# EAGLE board brd2 (EAGLE 6.4), part 1 of 2
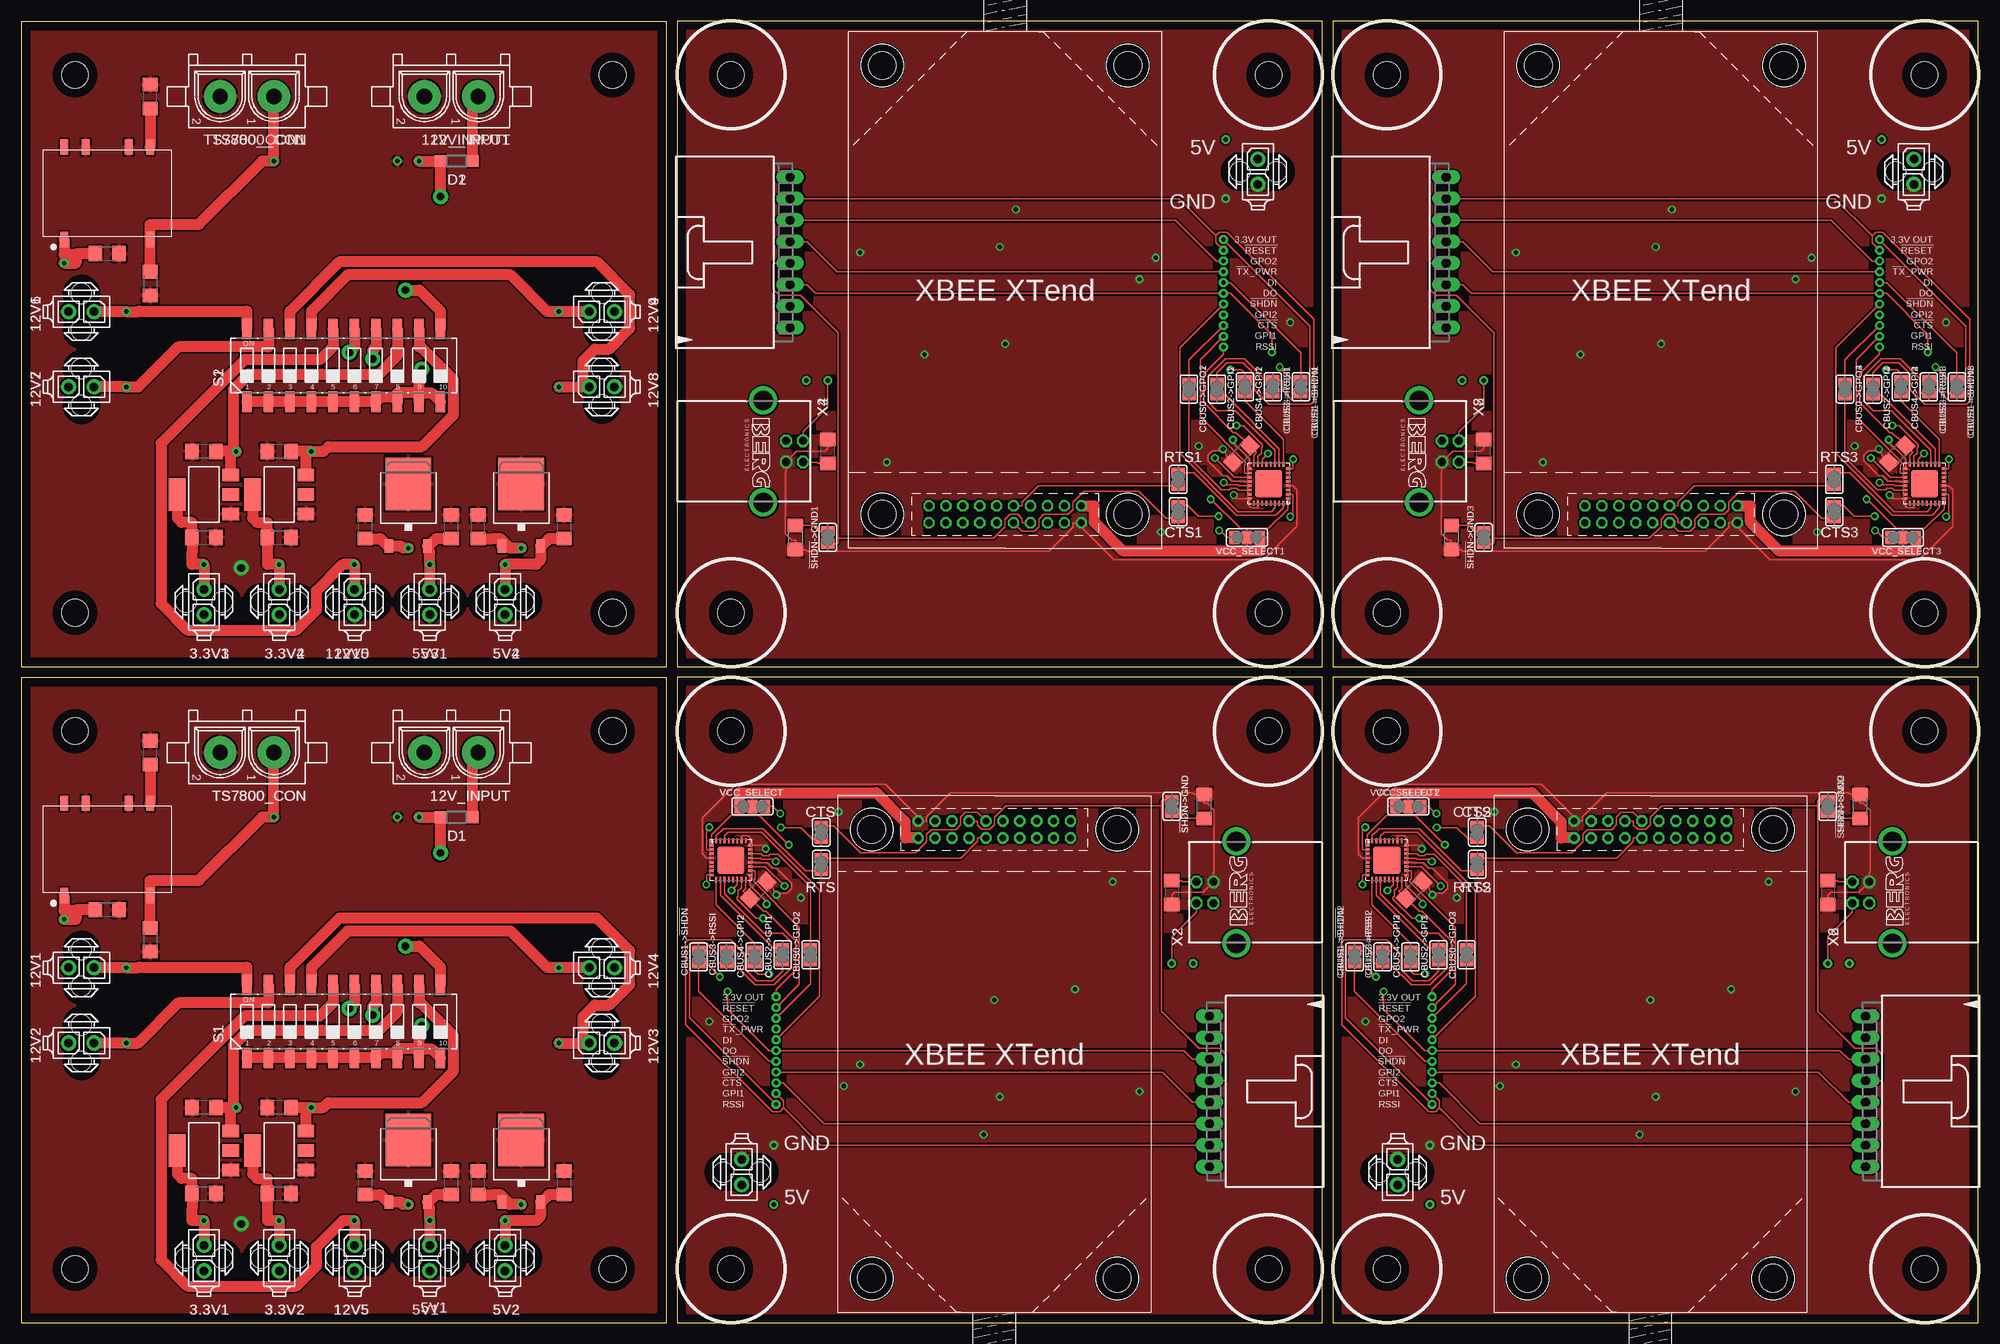
[diagram p0: board, top side]
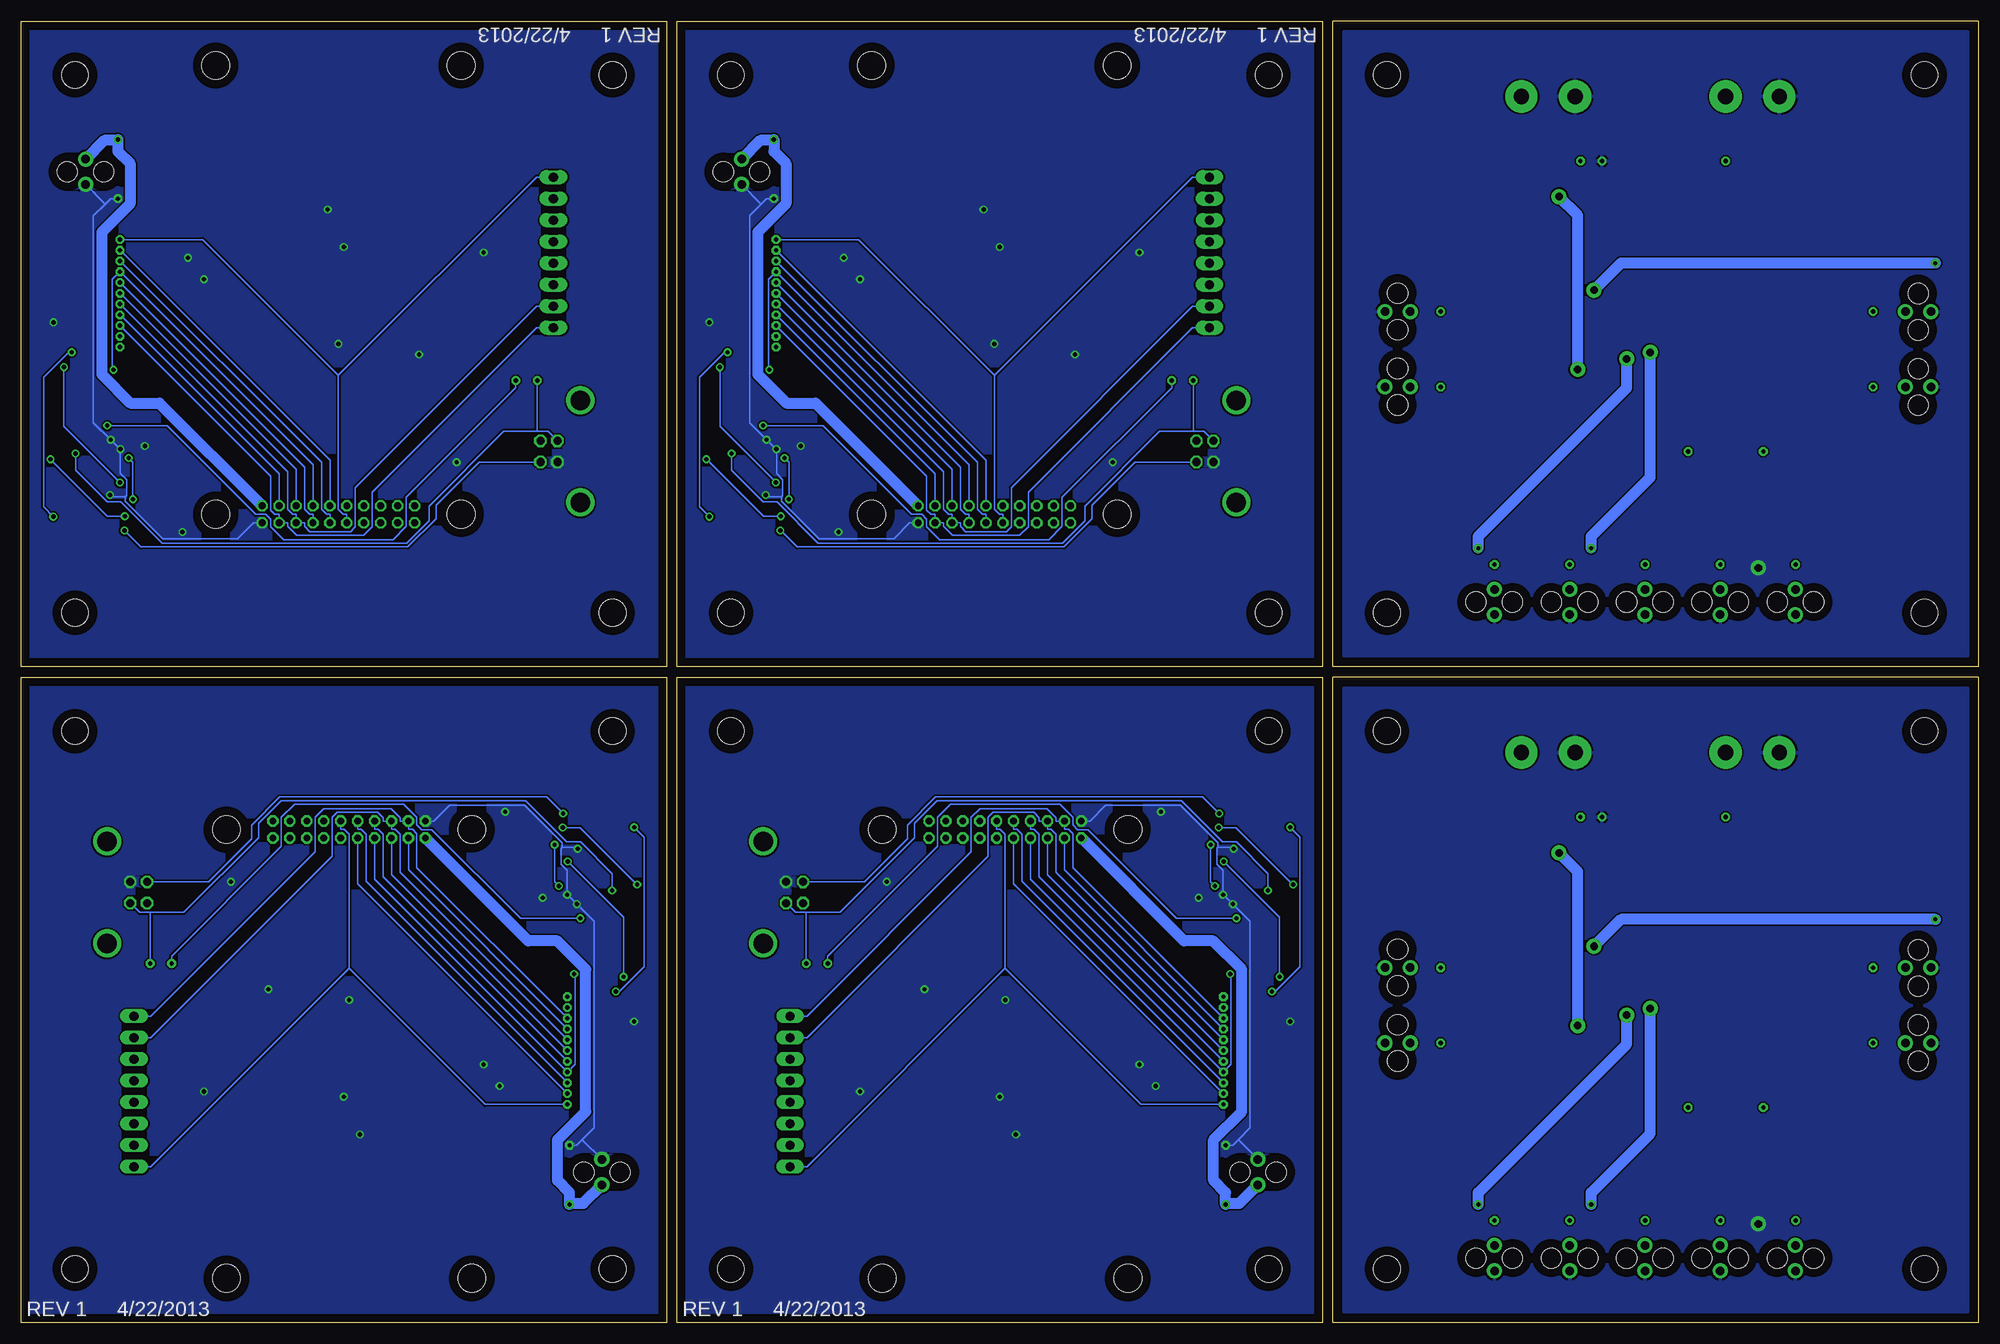
[diagram p1: board, bottom side, seen from below]

Size 231.14 x 153.67 mm. Coordinates in mm from the lower left corner, seen from the top.
Outline: 76.2,0 76.2,76.2 0,76.2 0,0 76.2,0
Outline: 77.47,0 153.67,0 153.67,76.2 77.47,76.2 77.47,0
Outline: 76.2,77.47 76.2,153.67 0,153.67 0,77.47 76.2,77.47
Outline: 153.67,153.67 77.47,153.67 77.47,77.47 153.67,77.47 153.67,153.67
Outline: 154.94,0 231.14,0 231.14,76.2 154.94,76.2 154.94,0
Outline: 231.14,153.67 154.94,153.67 154.94,77.47 231.14,77.47 231.14,153.67
Copper layers (1*16): Top 0.035mm / dielectric 1.5mm / Bottom 0.035mm
Design rules "default": minimum track width 10mil, minimum drill 0.6mm, track to track 8mil, track to pad 8mil, pad to pad 8mil, via to via 8mil, smd to smd 8mil, copper to edge 40mil, drill to drill 8mil, minimum pad ring 10mil, minimum via ring 8mil, stop-mask expansion 4mil, vias tented up to drill 0mil, thermal gap 10mil
Net classes: 1 Power: width 1.27 mm, drill 0.508 mm; 2 SMALL: width 0.178 mm
Holes 3.17 mm at 69.85,6.35 6.35,6.35 6.35,69.85 69.85,69.85 83.82,69.85 147.32,6.35 83.82,6.35 147.32,69.85 69.85,83.82 6.35,83.82 6.35,147.32 69.85,147.32 147.32,83.82 83.82,147.32 147.32,147.32 83.82,83.82 161.29,69.85 224.79,6.35 161.29,6.35 224.79,69.85 224.79,83.82 161.29,147.32 224.79,147.32 161.29,83.82
tRestrict: area 97.9,55.8 to 103,60.8; area 126.9,2.7 to 132,7.7; area 126.9,55.6 to 132,60.7; area 97.9,2.7 to 103,7.7; area 128.1,92.8 to 133.2,97.9; area 99.2,145.9 to 104.3,151; area 99.2,93 to 104.3,98; area 128.1,145.9 to 133.2,151; area 175.4,55.8 to 180.5,60.8; area 204.3,2.7 to 209.4,7.7; area 204.3,55.6 to 209.4,60.7; area 175.4,2.7 to 180.5,7.7; 4 more areas
bRestrict: area 126.9,55.6 to 132,60.7; area 97.9,2.7 to 103,7.7; area 97.9,55.8 to 103,60.8; area 126.9,2.7 to 132,7.7; area 99.2,93 to 104.3,98; area 128.1,145.9 to 133.2,151; area 128.1,92.8 to 133.2,97.9; area 99.2,145.9 to 104.3,151; area 204.3,55.6 to 209.4,60.7; area 175.4,2.7 to 180.5,7.7; area 175.4,55.8 to 180.5,60.8; area 204.3,2.7 to 209.4,7.7; 4 more areas
vRestrict: area 21.9,51.4 to 22,51.7; area 22,51.3 to 22,51.9; area 22,49.1 to 22,49.2; area 22,51.1 to 22,52; area 22,49.1 to 22,49.9; area 22,51.1 to 22.1,52.1; area 22,49.1 to 22.1,49.9; area 22.1,51 to 22.1,52.2; area 22.1,49.1 to 22.1,49.9; area 22.1,51 to 22.2,52.2; area 22.1,49.1 to 22.2,49.9; area 22.2,51 to 22.2,52.3; 5262 more areas

## Footprints (pad centres in the part's own frame; a part is rotated, then mirrored left to right if it is on the bottom)
794681-2 = drill 1 pad 1.778: 1 0,-1.5; 2 0,1.5 | hole 2.4: 2.13,0; -2.17,0
20MIL = drill 0.508 octagon: P$1 0,0
350759-4 = drill 1.8 pad 3.81: 1 -3.175,0; 2 3.175,0
C1206 = smd 1.6 x 1.8: 1 -1.4,0; 2 1.4,0
SJ = smd 1.168 x 1.6: 1 -0.762,0; 2 0.762,0
SOD123 = smd 1.4 x 1.4: A 1.9,0; C -1.9,0
QFN32 = smd 0.6 x 0.3: 1 -2.3,1.75; 2 -2.3,1.25; 3 -2.3,0.75; 4 -2.3,0.25; 5 -2.3,-0.25; 6 -2.3,-0.75; 7 -2.3,-1.25; 8 -2.3,-1.75; 17 2.3,-1.75; 18 2.3,-1.25; 19 2.3,-0.75; 20 2.3,-0.25; 21 2.3,0.25; 22 2.3,0.75; 23 2.3,1.25; 24 2.3,1.75 | smd 0.3 x 0.6: 9 -1.75,-2.3; 10 -1.25,-2.3; 11 -0.75,-2.3; 12 -0.25,-2.3; 13 0.25,-2.3; 14 0.75,-2.3; 15 1.25,-2.3; 16 1.75,-2.3; 25 1.75,2.3; 26 1.25,2.3; 27 0.75,2.3; 28 0.25,2.3; 29 -0.25,2.3; 30 -0.75,2.3; 31 -1.25,2.3; 32 -1.75,2.3 | smd 3.2 x 3.2: EXP 0,0
SOT223 = smd 1.5 x 2: 1 -2.3,-3.15; 2 0,-3.15; 3 2.3,-3.15 | smd 3.8 x 2: 4 0,3.15
TO252 = smd 1 x 1.6: 1 -2.28,-4.8; 2 2.28,-4.8 | smd 5.4 x 6.2: 3 0,2.5
R1206 = smd 1.6 x 1.803: 1 -1.422,0; 2 1.422,0
CTS-219-10 = smd 1.13 x 2.44: 1 -11.43,-4.3; 2 -8.89,-4.3; 3 -6.35,-4.3; 4 -3.81,-4.3; 5 -1.27,-4.3; 6 1.27,-4.3; 7 3.81,-4.3; 8 6.35,-4.3; 9 8.89,-4.3; 10 11.43,-4.3; 11 11.43,4.3; 12 8.89,4.3; 13 6.35,4.3; 14 3.81,4.3; 15 1.27,4.3; 16 -1.27,4.3; 17 -3.81,4.3; 18 -6.35,4.3; 19 -8.89,4.3; 20 -11.43,4.3
V7805 = smd 0.991 x 1.803: 1 0,0.902; 5 10.16,0.902; 6 10.16,11.798; 7 7.62,11.798; 9 2.54,11.798; 10 0,11.798
XTEND = drill 0.8 octagon: 1 9,3; 2 9,5; 3 7,3; 4 7,5; 5 5,3; 6 5,5; 7 3,3; 8 3,5; 9 1,3; 10 1,5; 11 -1,3; 12 -1,5; 13 -3,3; 14 -3,5; 15 -5,3; 16 -5,5; 17 -7,3; 18 -7,5; 19 -9,3; 20 -9,5 | hole 3.3: -14.5,57; 14.5,57; -14.5,4; 14.5,4
SJ_2 = smd 1.168 x 1.6: 1 -1.524,0; 2 0,0; 3 1.524,0
70553-08 = drill 1.092 long: 1 -8.89,-7.62; 2 -6.35,-7.62; 3 -3.81,-7.62; 4 -1.27,-7.62; 5 1.27,-7.62; 6 3.81,-7.62; 7 6.35,-7.62; 8 8.89,-7.62
PN61729-S = drill 0.95 octagon: 1 1.25,4.71; 2 -1.25,4.71; 3 -1.25,2.71; 4 1.25,2.71 | drill 2.3 pad 2.9: S1 -6.02,0; S2 6.02,0

## Placement (x,y rotation side)
3.3V1  794681-2  [794681-2]  21.59,7.62 180 top
3.3V2  794681-2  [794681-2]  30.48,7.62 180 top
3.3V3  794681-2  [794681-2]  21.59,85.09 180 top
3.3V4  794681-2  [794681-2]  30.48,85.09 180 top
3.3V_OUT  TESTPAD-20MIL  [20MIL]  89.15,38.48 0 top
3.3V_OUT1  TESTPAD-20MIL  [20MIL]  141.99,115.19 180 top
3.3V_OUT2  TESTPAD-20MIL  [20MIL]  166.62,38.48 0 top
3.3V_OUT3  TESTPAD-20MIL  [20MIL]  219.46,115.19 180 top
5V1  794681-2  [794681-2]  48.26,7.62 180 top
5V2  794681-2  [794681-2]  57.15,7.62 180 top
5V3  794681-2  [794681-2]  48.26,85.09 180 top
5V4  794681-2  [794681-2]  57.15,85.09 180 top
12V1  794681-2  [794681-2]  7.11,41.91 90 top
12V2  794681-2  [794681-2]  7.11,33.02 90 top
12V3  794681-2  [794681-2]  68.58,33.02 270 top
12V4  794681-2  [794681-2]  68.58,41.91 270 top
12V5  794681-2  [794681-2]  39.37,7.62 180 top
12V6  794681-2  [794681-2]  7.11,119.38 90 top
12V7  794681-2  [794681-2]  7.11,110.49 90 top
12V8  794681-2  [794681-2]  68.58,110.49 270 top
12V9  794681-2  [794681-2]  68.58,119.38 270 top
12V10  794681-2  [794681-2]  39.37,85.09 180 top
12V_INPUT  350759-4  [350759-4]  50.8,67.31 180 top
12V_INPUT1  350759-4  [350759-4]  50.8,144.78 180 top
317CAP1  .33uF  [C1206]  21.59,102.87 180 top
317CAP2  1uF  [C1206]  21.59,92.71 0 top
317CAP3  .33uF  [C1206]  21.59,25.4 180 top
317CAP4  .33uF  [C1206]  30.48,102.87 180 top
317CAP5  1uF  [C1206]  30.48,92.71 0 top
317CAP8  1uF  [C1206]  21.59,15.24 0 top
317CAP9  .33uF  [C1206]  30.48,25.4 180 top
317CAP10  1uF  [C1206]  30.48,15.24 0 top
!RESET!  TESTPAD-20MIL  [20MIL]  89.15,37.21 0 top
!RESET!1  TESTPAD-20MIL  [20MIL]  141.99,116.46 180 top
!RESET!2  TESTPAD-20MIL  [20MIL]  166.62,37.21 0 top
!RESET!3  TESTPAD-20MIL  [20MIL]  219.46,116.46 180 top
!SHDN!->GND  !SHDN!-GND  [SJ]  135.89,60.96 270 top
!SHDN!->GND1  !SHDN!-GND  [SJ]  95.25,92.71 90 top
!SHDN!->GND2  !SHDN!-GND  [SJ]  213.36,60.96 270 top
!SHDN!->GND3  !SHDN!-GND  [SJ]  172.72,92.71 90 top
C1  1uF  [C1206]  40.64,16.51 90 top
C2  1uF  [C1206]  50.8,16.51 90 top
C3  1uF  [C1206]  53.98,16.51 90 top
C4  1uF  [C1206]  64.14,16.51 90 top
C5  100nF  [C1206]  87.05,51.08 225 top
C6  100nF  [C1206]  135.89,50.8 270 top
C7  1uF  [C1206]  40.64,93.98 90 top
C8  1uF  [C1206]  50.8,93.98 90 top
C9  1uF  [C1206]  53.98,93.98 90 top
C10  1uF  [C1206]  64.14,93.98 90 top
C11  100nF  [C1206]  144.09,102.59 45 top
C12  100nF  [C1206]  95.25,102.87 90 top
C13  100nF  [C1206]  164.52,51.08 225 top
C14  100nF  [C1206]  213.36,50.8 270 top
C15  100nF  [C1206]  221.56,102.59 45 top
C16  100nF  [C1206]  172.72,102.87 90 top
CBUS0->GPO1  [SJ]  137.92,110.24 90 top
CBUS0->GPO2  [SJ]  93.22,43.43 270 top
CBUS0->GPO3  [SJ]  170.69,43.43 270 top
CBUS0->GPO4  [SJ]  215.39,110.24 90 top
CBUS1->!SHDN!  [SJ]  80.01,43.18 270 top
CBUS1->!SHDN!1  [SJ]  151.13,110.49 90 top
CBUS1->!SHDN!2  [SJ]  157.48,43.18 270 top
CBUS1->!SHDN!3  [SJ]  228.6,110.49 90 top
CBUS2->GPI1  [SJ]  89.92,43.43 270 top
CBUS2->GPI2  [SJ]  141.22,110.24 90 top
CBUS2->GPI3  [SJ]  167.39,43.43 270 top
CBUS2->GPI4  [SJ]  218.69,110.24 90 top
CBUS3->RSSI  [SJ]  83.31,43.18 270 top
CBUS3->RSSI1  [SJ]  147.83,110.49 90 top
CBUS3->RSSI2  [SJ]  160.78,43.18 270 top
CBUS3->RSSI3  [SJ]  225.3,110.49 90 top
CBUS4->GPI1  [SJ]  144.53,110.49 90 top
CBUS4->GPI2  [SJ]  86.61,43.18 270 top
CBUS4->GPI3  [SJ]  164.08,43.18 270 top
CBUS4->GPI4  [SJ]  222,110.49 90 top
CTS  [SJ]  94.49,57.91 90 top
CTS1  [SJ]  136.65,95.76 270 top
CTS2  [SJ]  171.96,57.91 90 top
CTS3  [SJ]  214.12,95.76 270 top
D1  [SOD123]  51.44,59.69 0 top
D2  [SOD123]  51.44,137.16 0 top
IC1  FT232RQ  [QFN32]  83.82,54.61 0 top
IC2  LD117AS12TR  [SOT223]  30.48,20.32 90 top
IC3  LD117AS12TR  [SOT223]  21.59,20.32 90 top
IC4  LD117AS12TR  [SOT223]  30.48,97.79 90 top
IC5  LD117AS12TR  [SOT223]  21.59,97.79 90 top
IC6  FT232RQ  [QFN32]  147.32,99.06 180 top
IC7  FT232RQ  [QFN32]  161.29,54.61 0 top
IC8  FT232RQ  [QFN32]  224.79,99.06 180 top
J1  794681-2  [794681-2]  85.09,17.78 0 top
J2  794681-2  [794681-2]  146.05,135.89 180 top
J3  794681-2  [794681-2]  162.56,17.78 0 top
J4  794681-2  [794681-2]  223.52,135.89 180 top
PWR_1  7805DT  [TO252]  45.72,19.05 0 top
PWR_2  7805DT  [TO252]  59.05,19.05 0 top
PWR_3  7805DT  [TO252]  45.72,96.52 0 top
PWR_4  7805DT  [TO252]  59.05,96.52 0 top
R1  10K  [R1206]  139.7,60.96 90 top
R2  10K  [R1206]  91.44,92.71 270 top
R3  10K  [R1206]  217.17,60.96 90 top
R4  10K  [R1206]  168.91,92.71 270 top
RTS  [SJ]  94.49,54.1 90 top
RTS1  [SJ]  136.65,99.57 270 top
RTS2  [SJ]  171.96,54.1 90 top
RTS3  [SJ]  214.12,99.57 270 top
S1  219-10  [CTS-219-10]  38.1,35.56 0 top
S2  219-10  [CTS-219-10]  38.1,113.03 0 top
TS7800_CON  350759-4  [350759-4]  26.67,67.31 180 top
TS7800_CON1  350759-4  [350759-4]  26.67,144.78 180 top
U$1  TESTPAD-20MIL  [20MIL]  48.26,12.06 0 top
U$2  V7805  [V7805]  5.08,49.53 0 top
U$3  TESTPAD-20MIL  [20MIL]  57.15,12.06 0 top
U$4  TESTPAD-20MIL  [20MIL]  5.08,47.62 0 top
U$5  TESTPAD-20MIL  [20MIL]  34.29,25.4 0 top
U$6  TESTPAD-20MIL  [20MIL]  25.4,25.4 0 top
U$7  TESTPAD-20MIL  [20MIL]  59.05,13.97 0 top
U$8  TESTPAD-20MIL  [20MIL]  45.72,13.97 0 top
U$9  TESTPAD-20MIL  [20MIL]  39.37,12.06 0 top
U$10  TESTPAD-20MIL  [20MIL]  63.5,41.91 0 top
U$11  TESTPAD-20MIL  [20MIL]  63.5,33.02 0 top
U$12  TESTPAD-20MIL  [20MIL]  12.45,33.02 0 top
U$13  TESTPAD-20MIL  [20MIL]  12.45,41.91 0 top
U$14  TESTPAD-20MIL  [20MIL]  21.59,12.06 0 top
U$15  TESTPAD-20MIL  [20MIL]  30.48,12.06 0 top
U$16  TESTPAD-20MIL  [20MIL]  29.84,59.69 0 top
U$17  TESTPAD-20MIL  [20MIL]  46.99,59.69 0 top
U$18  TESTPAD-20MIL  [20MIL]  44.45,59.69 0 top
U$19  XTEND  [XTEND]  114.94,62.23 180 top
U$20  TESTPAD-20MIL  [20MIL]  88.9,20.95 0 top
U$21  TESTPAD-20MIL  [20MIL]  88.9,13.97 0 top
U$22  TESTPAD-20MIL  [20MIL]  89.15,25.78 0 top
U$23  TESTPAD-20MIL  [20MIL]  89.15,27.05 0 top
U$24  TESTPAD-20MIL  [20MIL]  89.15,28.32 0 top
U$25  TESTPAD-20MIL  [20MIL]  89.15,29.59 0 top
U$26  TESTPAD-20MIL  [20MIL]  89.15,30.86 0 top
U$27  TESTPAD-20MIL  [20MIL]  89.15,35.94 0 top
U$28  TESTPAD-20MIL  [20MIL]  89.15,33.4 0 top
U$29  TESTPAD-20MIL  [20MIL]  89.15,32.13 0 top
U$30  TESTPAD-20MIL  [20MIL]  89.15,34.67 0 top
U$31  TESTPAD-20MIL  [20MIL]  135.89,42.42 0 top
U$32  TESTPAD-20MIL  [20MIL]  138.43,42.42 0 top
U$33  V7805  [V7805]  5.08,127 0 top
U$34  TESTPAD-20MIL  [20MIL]  48.26,89.53 0 top
U$35  TESTPAD-20MIL  [20MIL]  57.15,89.53 0 top
U$36  TESTPAD-20MIL  [20MIL]  5.08,125.09 0 top
U$37  TESTPAD-20MIL  [20MIL]  34.29,102.87 0 top
U$38  TESTPAD-20MIL  [20MIL]  25.4,102.87 0 top
U$39  TESTPAD-20MIL  [20MIL]  59.05,91.44 0 top
U$40  TESTPAD-20MIL  [20MIL]  45.72,91.44 0 top
U$41  TESTPAD-20MIL  [20MIL]  39.37,89.53 0 top
U$42  TESTPAD-20MIL  [20MIL]  63.5,119.38 0 top
U$43  TESTPAD-20MIL  [20MIL]  63.5,110.49 0 top
U$44  TESTPAD-20MIL  [20MIL]  12.45,110.49 0 top
U$45  TESTPAD-20MIL  [20MIL]  12.45,119.38 0 top
U$46  TESTPAD-20MIL  [20MIL]  21.59,89.53 0 top
U$47  TESTPAD-20MIL  [20MIL]  30.48,89.53 0 top
U$48  TESTPAD-20MIL  [20MIL]  29.84,137.16 0 top
U$49  TESTPAD-20MIL  [20MIL]  46.99,137.16 0 top
U$50  TESTPAD-20MIL  [20MIL]  44.45,137.16 0 top
U$51  XTEND  [XTEND]  116.2,91.44 0 top
U$52  TESTPAD-20MIL  [20MIL]  142.24,132.72 180 top
U$53  TESTPAD-20MIL  [20MIL]  142.24,139.7 180 top
U$54  TESTPAD-20MIL  [20MIL]  141.99,127.89 180 top
U$55  TESTPAD-20MIL  [20MIL]  141.99,126.62 180 top
U$56  TESTPAD-20MIL  [20MIL]  141.99,125.35 180 top
U$57  TESTPAD-20MIL  [20MIL]  141.99,124.08 180 top
U$58  TESTPAD-20MIL  [20MIL]  141.99,122.81 180 top
U$59  TESTPAD-20MIL  [20MIL]  141.99,117.73 180 top
U$60  TESTPAD-20MIL  [20MIL]  141.99,120.27 180 top
U$61  TESTPAD-20MIL  [20MIL]  141.99,121.54 180 top
U$62  TESTPAD-20MIL  [20MIL]  141.99,119 180 top
U$63  TESTPAD-20MIL  [20MIL]  95.25,111.25 180 top
U$64  TESTPAD-20MIL  [20MIL]  92.71,111.25 180 top
U$65  XTEND  [XTEND]  192.41,62.23 180 top
U$66  TESTPAD-20MIL  [20MIL]  166.37,20.95 0 top
U$67  TESTPAD-20MIL  [20MIL]  166.37,13.97 0 top
U$68  TESTPAD-20MIL  [20MIL]  166.62,25.78 0 top
U$69  TESTPAD-20MIL  [20MIL]  166.62,27.05 0 top
U$70  TESTPAD-20MIL  [20MIL]  166.62,28.32 0 top
U$71  TESTPAD-20MIL  [20MIL]  166.62,29.59 0 top
U$72  TESTPAD-20MIL  [20MIL]  166.62,30.86 0 top
U$73  TESTPAD-20MIL  [20MIL]  166.62,35.94 0 top
U$74  TESTPAD-20MIL  [20MIL]  166.62,33.4 0 top
U$75  TESTPAD-20MIL  [20MIL]  166.62,32.13 0 top
U$76  TESTPAD-20MIL  [20MIL]  166.62,34.67 0 top
U$77  TESTPAD-20MIL  [20MIL]  213.36,42.42 0 top
U$78  TESTPAD-20MIL  [20MIL]  215.9,42.42 0 top
U$79  XTEND  [XTEND]  193.68,91.44 0 top
U$80  TESTPAD-20MIL  [20MIL]  219.71,132.72 180 top
U$81  TESTPAD-20MIL  [20MIL]  219.71,139.7 180 top
U$82  TESTPAD-20MIL  [20MIL]  219.46,127.89 180 top
U$83  TESTPAD-20MIL  [20MIL]  219.46,126.62 180 top
U$84  TESTPAD-20MIL  [20MIL]  219.46,125.35 180 top
U$85  TESTPAD-20MIL  [20MIL]  219.46,124.08 180 top
U$86  TESTPAD-20MIL  [20MIL]  219.46,122.81 180 top
U$87  TESTPAD-20MIL  [20MIL]  219.46,117.73 180 top
U$88  TESTPAD-20MIL  [20MIL]  219.46,120.27 180 top
U$89  TESTPAD-20MIL  [20MIL]  219.46,121.54 180 top
U$90  TESTPAD-20MIL  [20MIL]  219.46,119 180 top
U$91  TESTPAD-20MIL  [20MIL]  172.72,111.25 180 top
U$92  TESTPAD-20MIL  [20MIL]  170.18,111.25 180 top
V7805_C1  1uF  [C1206]  15.24,144.78 90 top
V7805_C2  1uF  [C1206]  10.16,126.24 0 top
V7805_C3  1uF  [C1206]  15.24,122.68 270 top
V7805_C4  1uF  [C1206]  15.24,67.31 90 top
V7805_C5  1uF  [C1206]  10.16,48.77 0 top
V7805_C6  1uF  [C1206]  15.24,45.21 270 top
VCC_SELECT  [SJ_2]  86.36,60.96 180 top
VCC_SELECT1  [SJ_2]  144.78,92.71 0 top
VCC_SELECT2  [SJ_2]  163.83,60.96 180 top
VCC_SELECT3  [SJ_2]  222.25,92.71 0 top
X1  C-GRID-08-70553  [70553-08]  147.96,27.3 270 top
X2  PN61729-S  [PN61729-S]  143.51,50.8 90 top
X3  C-GRID-08-70553  [70553-08]  83.19,126.36 90 top
X4  PN61729-S  [PN61729-S]  87.63,102.87 270 top
X5  C-GRID-08-70553  [70553-08]  225.43,27.3 270 top
X6  PN61729-S  [PN61729-S]  220.98,50.8 90 top
X7  C-GRID-08-70553  [70553-08]  160.66,126.36 90 top
X8  PN61729-S  [PN61729-S]  165.1,102.87 270 top

## Library data of the parts
3.3V1-3.3V4 5V1-5V4 12V1-12V10 12V_INPUT 12V_INPUT1 J1-J4 = con-amp
3.3V_OUT 3.3V_OUT1-3.3V_OUT3 !RESET! !RESET!1-!RESET!3 U$1 U$3-U$18 U$20-U$32 U$34-U$50 U$52-U$64 U$66-U$78 U$80-U$92 = LTC6803
317CAP1-317CAP5 317CAP8-317CAP10 C1-C16 R1-R4 V7805_C1-V7805_C6 = rcl
!SHDN!->GND !SHDN!->GND1-!SHDN!->GND3 CBUS0->GPO1-CBUS0->GPO4 CBUS1->!SHDN! CBUS1->!SHDN!1-CBUS1->!SHDN!3 CBUS2->GPI1-CBUS2->GPI4 CBUS3->RSSI CBUS3->RSSI1-CBUS3->RSSI3 CBUS4->GPI1-CBUS4->GPI4 CTS CTS1-CTS3 RTS RTS1-RTS3 VCC_SELECT VCC_SELECT1-VCC_SELECT3 = jumper
D1 D2 = diode
IC1 IC6-IC8 = ftdichip; MPN: FT232RQ; OC_FARNELL: 1146033; OC_NEWARK: 91K9919
IC2-IC5 = v-reg
PWR_1-PWR_4 = linear
S1 S2 = switch-dil; MF: SLI (CML/IDI); MPN: 219-10PK; OC_FARNELL: unknown; OC_NEWARK: 19M0224
TS7800_CON TS7800_CON1 = con-amp; NEG: -; POS: +
U$2 U$33 = V7805
U$19 U$51 U$65 U$79 = SolarJackets_Common
X1 X3 X5 X7 = con-molex; OC_FARNELL: unknown; OC_NEWARK: unknown
X2 X4 X6 X8 = con-berg; OC_FARNELL: unknown; OC_NEWARK: unknown

## Nets
3.3V1: 3.3V1.1 317CAP8.1 IC3.4 U$14.P$1
3.3V1_EN: 317CAP3.1 IC3.3 S1.13 U$6.P$1
3.3V1_EN1: 317CAP1.1 IC5.3 S2.13 U$38.P$1
3.3V2: 3.3V2.1 317CAP10.1 IC2.4 U$15.P$1
3.3V2_EN: 317CAP9.1 IC2.3 S1.12 U$5.P$1
3.3V2_EN1: 317CAP4.1 IC4.3 S2.12 U$37.P$1
3.3V3: 3.3V3.1 317CAP2.1 IC5.4 U$46.P$1
3.3V4: 3.3V4.1 317CAP5.1 IC4.4 U$47.P$1
5V1: 5V1.1 C2.1 PWR_1.2 U$1.P$1
5V1_EN: C1.1 PWR_1.1 S1.15 U$8.P$1
5V1_EN1: C7.1 PWR_3.1 S2.15 U$40.P$1
5V2: 5V2.1 C4.1 PWR_2.2 U$3.P$1
5V2_EN: C3.1 PWR_2.1 S1.14 U$7.P$1
5V2_EN1: C9.1 PWR_4.1 S2.14 U$39.P$1
5V3: 5V4.1 C10.1 PWR_4.2 U$35.P$1
5V4: 5V3.1 C8.1 PWR_3.2 U$34.P$1
12V [Power]: D1.C S1.1 S1.2 S1.3 S1.4 S1.5 S1.6 S1.7 S1.8 S1.9 S1.10 U$17.P$1
12V1 [Power]: D2.C S2.1 S2.2 S2.3 S2.4 S2.5 S2.6 S2.7 S2.8 S2.9 S2.10 U$49.P$1
12V1_EN: 12V1.1 S1.20 U$13.P$1
12V1_EN1: 12V6.1 S2.20 U$45.P$1
12V2_EN: 12V2.1 S1.19 U$12.P$1
12V2_EN1: 12V7.1 S2.19 U$44.P$1
12V3_EN: 12V3.1 S1.18 U$11.P$1
12V3_EN1: 12V8.1 S2.18 U$43.P$1
12V4_EN: 12V4.1 S1.17 U$10.P$1
12V4_EN1: 12V9.1 S2.17 U$42.P$1
12V5_EN: 12V5.1 S1.16 U$9.P$1
12V5_EN1: 12V10.1 S2.16 U$41.P$1
CTS: CTS.2 U$19.9 U$24.P$1 X1.6
CTS1: CTS1.2 U$51.9 U$56.P$1 X3.6
CTS2: CTS2.2 U$65.9 U$70.P$1 X5.6
CTS3: CTS3.2 U$79.9 U$84.P$1 X7.6
GND: 3.3V1.2 3.3V2.2 5V1.2 5V2.2 12V1.2 12V2.2 12V3.2 12V4.2 12V5.2 12V_INPUT.2 317CAP3.2 317CAP8.2 317CAP9.2 317CAP10.2 C1.2 C2.2 C3.2 C4.2 IC2.1 IC3.1 PWR_1.3 PWR_2.3 TS7800_CON.2 U$2.7 U$2.9 U$18.P$1 V7805_C4.2 V7805_C5.2 V7805_C6.2
GND1 [SMALL]: C5.1 C6.2 IC1.4 IC1.17 IC1.20 IC1.24 IC1.26 J1.2 R1.2 U$19.1 U$20.P$1 X2.4
GND2: 3.3V3.2 3.3V4.2 5V3.2 5V4.2 12V6.2 12V7.2 12V8.2 12V9.2 12V10.2 12V_INPUT1.2 317CAP1.2 317CAP2.2 317CAP4.2 317CAP5.2 C7.2 C8.2 C9.2 C10.2 IC4.1 IC5.1 PWR_3.3 PWR_4.3 TS7800_CON1.2 U$33.7 U$33.9 U$50.P$1 V7805_C1.2 V7805_C2.2 V7805_C3.2
GND3 [SMALL]: C11.1 C12.2 IC6.4 IC6.17 IC6.20 IC6.24 IC6.26 J2.2 R2.2 U$51.1 U$52.P$1 X4.4
GND4 [SMALL]: C13.1 C14.2 IC7.4 IC7.17 IC7.20 IC7.24 IC7.26 J3.2 R3.2 U$65.1 U$66.P$1 X6.4
GND5 [SMALL]: C15.1 C16.2 IC8.4 IC8.17 IC8.20 IC8.24 IC8.26 J4.2 R4.2 U$79.1 U$80.P$1 X8.4
GPI1: CBUS2->GPI1.2 RTS.2 U$19.10 U$23.P$1 X1.7
GPI2: CBUS4->GPI2.2 U$19.8 U$25.P$1 X1.5
GPI3: CBUS4->GPI1.2 U$51.8 U$57.P$1 X3.5
GPI4: CBUS2->GPI2.2 RTS1.2 U$51.10 U$55.P$1 X3.7
GPI5: CBUS4->GPI3.2 U$65.8 U$71.P$1 X5.5
GPI6: CBUS2->GPI3.2 RTS2.2 U$65.10 U$69.P$1 X5.7
GPI7: CBUS4->GPI4.2 U$79.8 U$85.P$1 X7.5
GPI8: CBUS2->GPI4.2 RTS3.2 U$79.10 U$83.P$1 X7.7
GPO1: CBUS0->GPO1.2 U$51.3 U$59.P$1 X3.1
GPO2: CBUS0->GPO2.2 U$19.3 U$27.P$1 X1.1
GPO3: CBUS0->GPO3.2 U$65.3 U$73.P$1 X5.1
GPO4: CBUS0->GPO4.2 U$79.3 U$87.P$1 X7.1
N$1: U$2.6 V7805_C4.1
N$2 [SMALL]: IC1.32 RTS.1
N$3: 12V_INPUT.1 D1.A
N$4 [SMALL]: CTS.1 IC1.8
N$5: !SHDN!->GND.2 R1.1
N$6 [SMALL]: CBUS0->GPO2.1 IC1.22
N$7 [SMALL]: CBUS1->!SHDN!.1 IC1.21
N$8 [SMALL]: CBUS2->GPI1.1 IC1.10
N$9 [SMALL]: CBUS3->RSSI.1 IC1.11
N$10 [SMALL]: CBUS4->GPI2.1 IC1.9
N$11 [SMALL]: IC1.1 IC1.19 VCC_SELECT.2
N$12 [SMALL]: 3.3V_OUT.P$1 C5.2 IC1.16
N$13 [SMALL]: !RESET!.P$1 IC1.18
N$14: U$33.6 V7805_C1.1
N$15: 12V_INPUT1.1 D2.A
N$16 [SMALL]: IC6.32 RTS1.1
N$17 [SMALL]: CTS1.1 IC6.8
N$18: !SHDN!->GND1.2 R2.1
N$19 [SMALL]: CBUS0->GPO1.1 IC6.22
N$20 [SMALL]: CBUS1->!SHDN!1.1 IC6.21
N$21 [SMALL]: CBUS2->GPI2.1 IC6.10
N$22 [SMALL]: CBUS3->RSSI1.1 IC6.11
N$23 [SMALL]: CBUS4->GPI1.1 IC6.9
N$24 [SMALL]: IC6.1 IC6.19 VCC_SELECT1.2
N$25 [SMALL]: 3.3V_OUT1.P$1 C11.2 IC6.16
N$26 [SMALL]: !RESET!1.P$1 IC6.18
N$27 [SMALL]: IC7.32 RTS2.1
N$28 [SMALL]: CTS2.1 IC7.8
N$29: !SHDN!->GND2.2 R3.1
N$30 [SMALL]: CBUS0->GPO3.1 IC7.22
N$31 [SMALL]: CBUS1->!SHDN!2.1 IC7.21
N$32 [SMALL]: CBUS2->GPI3.1 IC7.10
N$33 [SMALL]: CBUS3->RSSI2.1 IC7.11
N$34 [SMALL]: CBUS4->GPI3.1 IC7.9
N$35 [SMALL]: IC7.1 IC7.19 VCC_SELECT2.2
N$36 [SMALL]: 3.3V_OUT2.P$1 C13.2 IC7.16
N$37 [SMALL]: !RESET!2.P$1 IC7.18
N$38 [SMALL]: IC8.32 RTS3.1
N$39 [SMALL]: CTS3.1 IC8.8
N$40: !SHDN!->GND3.2 R4.1
N$41 [SMALL]: CBUS0->GPO4.1 IC8.22
N$42 [SMALL]: CBUS1->!SHDN!3.1 IC8.21
N$43 [SMALL]: CBUS2->GPI4.1 IC8.10
N$44 [SMALL]: CBUS3->RSSI3.1 IC8.11
N$45 [SMALL]: CBUS4->GPI4.1 IC8.9
N$46 [SMALL]: IC8.1 IC8.19 VCC_SELECT3.2
N$47 [SMALL]: 3.3V_OUT3.P$1 C15.2 IC8.16
N$48 [SMALL]: !RESET!3.P$1 IC8.18
RSSI: CBUS3->RSSI.2 U$19.11 U$22.P$1 X1.8
RSSI1: CBUS3->RSSI1.2 U$51.11 U$54.P$1 X3.8
RSSI2: CBUS3->RSSI2.2 U$65.11 U$68.P$1 X5.8
RSSI3: CBUS3->RSSI3.2 U$79.11 U$82.P$1 X7.8
RX [SMALL]: IC1.2 U$19.6 U$29.P$1 X1.3
RX1 [SMALL]: IC6.2 U$51.6 U$61.P$1 X3.3
RX2 [SMALL]: IC7.2 U$65.6 U$75.P$1 X5.3
RX3 [SMALL]: IC8.2 U$79.6 U$89.P$1 X7.3
SHDN: !SHDN!->GND.1 CBUS1->!SHDN!.2 U$19.7 U$26.P$1 X1.4
SHDN1: !SHDN!->GND1.1 CBUS1->!SHDN!1.2 U$51.7 U$58.P$1 X3.4
SHDN2: !SHDN!->GND2.1 CBUS1->!SHDN!2.2 U$65.7 U$72.P$1 X5.4
SHDN3: !SHDN!->GND3.1 CBUS1->!SHDN!3.2 U$79.7 U$86.P$1 X7.4
TS7800_+ [Power]: TS7800_CON.1 U$2.5 U$16.P$1 V7805_C6.1
TS7800_+1 [Power]: TS7800_CON1.1 U$33.5 U$48.P$1 V7805_C3.1
TS7800_EN [Power]: S1.11 U$2.1 U$4.P$1 V7805_C5.1
TS7800_EN1 [Power]: S2.11 U$33.1 U$36.P$1 V7805_C2.1
TX [SMALL]: IC1.30 U$19.5 U$28.P$1 X1.2
TX1 [SMALL]: IC6.30 U$51.5 U$60.P$1 X3.2
TX2 [SMALL]: IC7.30 U$65.5 U$74.P$1 X5.2
TX3 [SMALL]: IC8.30 U$79.5 U$88.P$1 X7.2
TX_PWR: U$19.4 U$30.P$1
TX_PWR1: U$51.4 U$62.P$1
TX_PWR2: U$65.4 U$76.P$1
TX_PWR3: U$79.4 U$90.P$1
USB_VCC: C6.1 VCC_SELECT.1 X2.1
USB_VCC1: C12.1 VCC_SELECT1.1 X4.1
USB_VCC2: C14.1 VCC_SELECT2.1 X6.1
USB_VCC3: C16.1 VCC_SELECT3.1 X8.1
USBDM [SMALL]: IC1.15 U$31.P$1 X2.2
USBDM1 [SMALL]: IC6.15 U$63.P$1 X4.2
USBDM2 [SMALL]: IC7.15 U$77.P$1 X6.2
USBDM3 [SMALL]: IC8.15 U$91.P$1 X8.2
USBDP [SMALL]: IC1.14 U$32.P$1 X2.3
USBDP1 [SMALL]: IC6.14 U$64.P$1 X4.3
USBDP2 [SMALL]: IC7.14 U$78.P$1 X6.3
USBDP3 [SMALL]: IC8.14 U$92.P$1 X8.3
VCC [Power]: J1.1 U$19.2 U$21.P$1 VCC_SELECT.3
VCC1 [Power]: J2.1 U$51.2 U$53.P$1 VCC_SELECT1.3
VCC2 [Power]: J3.1 U$65.2 U$67.P$1 VCC_SELECT2.3
VCC3 [Power]: J4.1 U$79.2 U$81.P$1 VCC_SELECT3.3